# EAGLE board teros_a3977 (EAGLE 4.13)
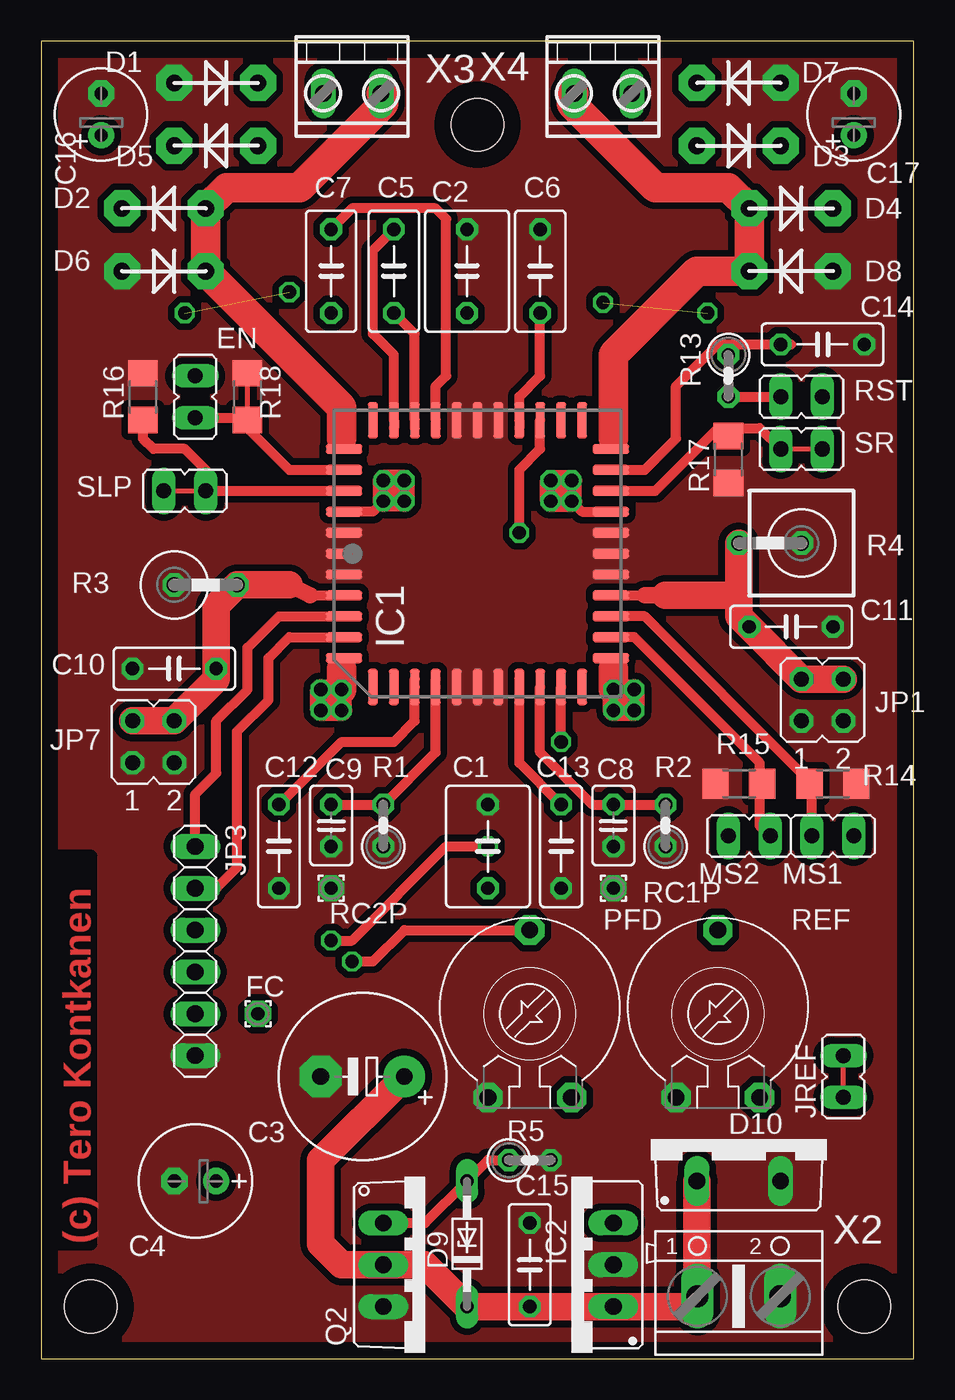
[diagram p0: board, top side]
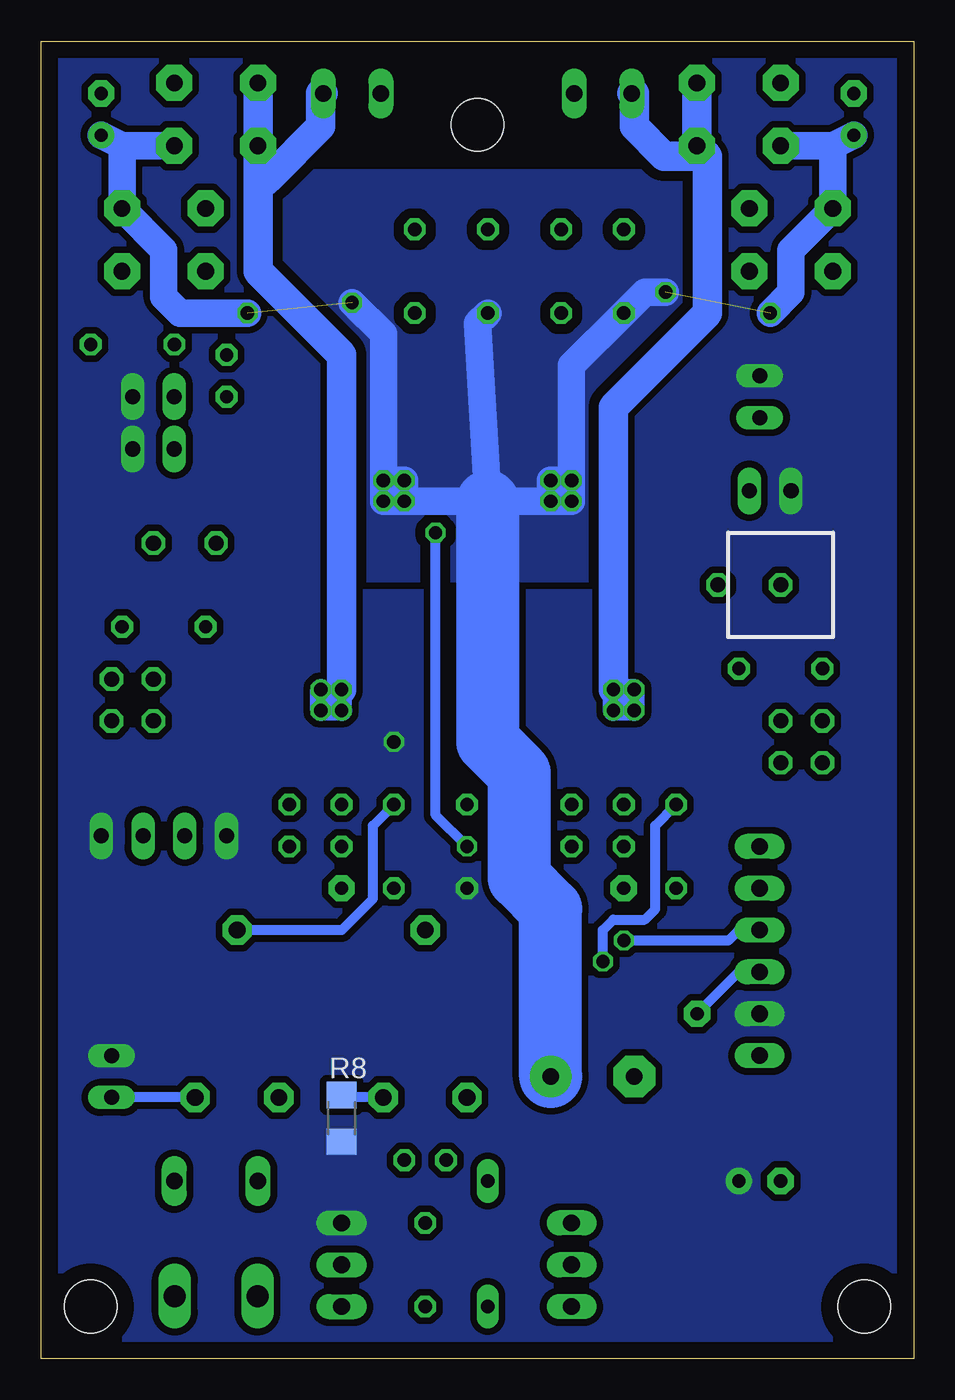
[diagram p1: board, bottom side, seen from below]

Size 53.01 x 80 mm. Coordinates in mm from the lower left corner, seen from the top.
Outline: 0,0 53.01,0 53.01,80 0,80 0,0
Copper layers (1*16): Top 0.035mm / dielectric 1.5mm / Bottom 0.035mm
Design rules "olimex10mils": minimum track width 10mil, minimum drill 24mil, track to track 10mil, track to pad 10mil, pad to pad 10mil, via to via 10mil, smd to smd 10mil, copper to edge 40mil, drill to drill 10mil, minimum pad ring 10mil, minimum via ring 8mil, stop-mask expansion 0mil, vias tented up to drill 0mil, thermal gap 10mil
Holes 3.2 mm at 26.5,74.92 3.01,3.17 50,3.17

## Footprints (pad centres in the part's own frame; a part is rotated, then mirrored left to right if it is on the bottom)
C050-050X075 = drill 0.813 octagon: 1 -2.54,0; 2 2.54,0
E5-10,5 = drill 1.016 pad 2.54 round: + -2.54,0 | drill 1.016 pad 2.54 octagon: - 2.54,0
E2,5-7 = drill 0.813 pad 1.6 round: + -1.27,0 | drill 0.813 pad 1.6 octagon: - 1.27,0
C050-030X075 = drill 0.813 octagon: 1 -2.54,0; 2 2.54,0
C025-025X050 = drill 0.813 octagon: 1 -1.27,0; 2 1.27,0
C050-025X075 = drill 0.813 octagon: 1 -2.54,0; 2 2.54,0
E2,5-6 = drill 0.813 pad 1.6 round: + -1.27,0 | drill 0.813 pad 1.6 octagon: - 1.27,0
DIODE = drill 1.016 pad 2.184 octagon: A 2.54,0; K -2.54,0
DO34Z7 = drill 0.813 long: A 3.81,0; C -3.81,0
TO220ACS = drill 1.016 long: A 2.54,-2.54; C -2.54,-2.54
JP1 = drill 0.914 long: 1 0,-1.27; 2 0,1.27
1,6/0,8 = drill 0.813 pad 1.6 octagon: 1 0,0
PLCC44 = smd 0.6 x 2.2: 1 0,8.1; 2 -1.27,8.1; 3 -2.54,8.1; 4 -3.81,8.1; 5 -5.08,8.1; 6 -6.35,8.1; 18 -6.35,-8.1; 19 -5.08,-8.1; 20 -3.81,-8.1; 21 -2.54,-8.1; 22 -1.27,-8.1; 23 0,-8.1; 24 1.27,-8.1; 25 2.54,-8.1; 26 3.81,-8.1; 27 5.08,-8.1; 28 6.35,-8.1; 40 6.35,8.1; 41 5.08,8.1; 42 3.81,8.1; 43 2.54,8.1; 44 1.27,8.1 | smd 2.2 x 0.6: 7 -8.1,6.35; 8 -8.1,5.08; 9 -8.1,3.81; 10 -8.1,2.54; 11 -8.1,1.27; 12 -8.1,0; 13 -8.1,-1.27; 14 -8.1,-2.54; 15 -8.1,-3.81; 16 -8.1,-5.08; 17 -8.1,-6.35; 29 8.1,-6.35; 30 8.1,-5.08; 31 8.1,-3.81; 32 8.1,-2.54; 33 8.1,-1.27; 34 8.1,0; 35 8.1,1.27; 36 8.1,2.54; 37 8.1,3.81; 38 8.1,5.08; 39 8.1,6.35
78XXS = drill 1.016 long: GND 0,-2.54; IN -2.54,-2.54; OUT 2.54,-2.54
JP2Q = drill 0.914 octagon: 1 -1.27,-1.27; 2 -1.27,1.27; 3 1.27,-1.27; 4 1.27,1.27
1X06 = drill 1.016 long: 1 -6.35,0; 2 -3.81,0; 3 -1.27,0; 4 1.27,0; 5 3.81,0; 6 6.35,0
PT-10 = drill 1.016 pad 1.778 octagon: 1 -2.54,-5.08; 2 2.54,-5.08; 3 0,5.08
TO220AV = drill 1.016 long: B -2.54,-2.54; C 0,-2.54; E 2.54,-2.54
0207/2V = drill 0.813 octagon: 1 -1.27,0; 2 1.27,0
0411V = drill 0.914 octagon: 1 -2.54,0; 2 1.27,0
R1206 = smd 1.6 x 1.803: 1 -1.422,0; 2 1.422,0
AK500/2 = drill 1.321 long: 1 -2.515,0; 2 2.515,0
AK550/2 = drill 1 pad 1.5 long: 1 -1.75,0; 2 1.75,0

## Placement (x,y rotation side)
C1  220n  [C050-050X075]  27.14,31.11 90 top
C2  220n  [C050-050X075]  25.87,66.03 90 top
C3  470u/35V  [E5-10,5]  19.52,17.14 180 top
C4  330u/5V  [E2,5-7]  9.36,10.79 180 top
C5  0.22u  [C050-030X075]  21.42,66.03 90 top
C6  0.22u  [C050-030X075]  30.31,66.03 270 top
C7  0.22u  [C050-030X075]  17.61,66.03 90 top
C8  0.001u  [C025-025X050]  34.76,32.38 90 top
C9  0.001u  [C025-025X050]  17.61,32.38 90 top
C10  0.1u  [C050-025X075]  8.09,41.91 180 top
C11  0.1u  [C050-025X075]  45.55,44.45 0 top
C12  0.1u  [C050-025X075]  14.44,31.11 90 top
C13  0.1u  [C050-025X075]  31.58,31.11 90 top
C14  0.1u  [C050-025X075]  47.46,61.59 0 top
C15  0.1u  [C050-025X075]  29.68,5.71 270 top
C16  100u/35V  [E2,5-6]  3.64,75.56 90 top
C17  100u/35V  [E2,5-6]  49.37,75.56 90 top
D1  BYV27  [DIODE]  10.63,73.66 0 top
D2  BYV27  [DIODE]  7.46,69.84 0 top
D3  BYV27  [DIODE]  42.38,73.66 180 top
D4  BYV27  [DIODE]  45.55,69.84 180 top
D5  BYV27  [DIODE]  10.63,77.46 180 top
D6  BYV27  [DIODE]  7.46,66.03 180 top
D7  BYV27  [DIODE]  42.38,77.46 0 top
D8  BYV27  [DIODE]  45.55,66.03 0 top
D9  34V  [DO34Z7]  25.87,6.98 90 top
D10  PBYR1645  [TO220ACS]  42.38,13.33 0 top
EN  [JP1]  9.36,58.41 0 top
FC  [1,6/0,8]  13.17,20.95 0 top
IC1  A3977SED  [PLCC44]  26.5,48.89 90 top
IC2  7805  [78XXS]  32.22,5.71 90 top
JP1  [JP2Q]  47.46,40 0 top
JP3  [1X06]  9.36,24.76 270 top
JP7  [JP2Q]  6.82,37.46 0 top
JREF  [JP1]  48.73,17.14 0 top
MS1  [JP1]  48.09,31.74 270 top
MS2  [JP1]  43.02,31.74 90 top
PFD  1k  [PT-10]  29.68,20.95 0 top
Q2  TIP121  [TO220AV]  23.33,5.71 270 top
R1  30k  [0207/2V]  20.79,32.38 90 top
R2  30k  [0207/2V]  37.94,32.38 90 top
R3  0.20  [0411V]  10.63,46.98 0 top
R4  0.20  [0411V]  43.65,49.53 180 top
R5  10k  [0207/2V]  29.68,12.06 0 top
R8  820  [R1206]  34.76,14.6 270 bottom
R13  10k  [0207/2V]  41.74,59.69 270 top
R14  10k  [R1206]  48.09,34.92 0 top
R15  10k  [R1206]  42.38,34.92 180 top
R16  10k  [R1206]  6.18,58.41 90 top
R17  10k  [R1206]  41.74,54.61 270 top
R18  10k  [R1206]  12.54,58.41 90 top
RC1P  [1,6/0,8]  34.76,28.57 0 top
RC2P  [1,6/0,8]  17.61,28.57 0 top
REF  1k  [PT-10]  41.11,20.95 0 top
RST  [JP1]  46.19,58.41 270 top
SLP  [JP1]  8.73,52.7 90 top
SR  [JP1]  46.19,55.24 270 top
X2  [AK500/2]  42.38,3.8 0 top
X3  AK550/2  [AK550/2]  18.88,76.83 180 top
X4  AK550/2  [AK550/2]  34.12,76.83 180 top

## Library data of the parts
C1-C17 R1-R5 R8 R13-R18 = rcl
D1-D8 IC1 = stepper
D9 D10 = diode
EN JP1 JP7 JREF MS1 MS2 RST SLP SR = jumper
FC RC1P RC2P = wirepad
IC2 = v-reg
JP3 = pinhead
PFD REF = discrete
Q2 = transistor-power
X2-X4 = con-ptr500

## Nets
ENABLE: EN.1 IC1.41 R18.1
GND: C1.2 C2.2 C3.- C4.- C6.1 C8.1 C9.1 C10.2 C11.2 C12.1 C13.1 C14.2 C15.1 C16.- C17.- D5.A D6.A D7.A D8.A D10.A IC1.1 IC1.2 IC1.11 IC1.12 IC1.13 IC1.22 IC1.23 IC1.24 IC1.33 IC1.34 IC1.35 IC1.44 IC2.GND JP1.1 JP1.3 JP3.6 JP7.1 JP7.3 PFD.1 Q2.E R1.1 R2.1 R3.1 R4.1 R5.2 R14.2 R15.2 R16.2 R17.2 R18.2 RC1P.1 RC2P.1 REF.1 X2.2
MS1: IC1.20 MS1.1 R14.1
MS2: IC1.19 MS2.1 R15.1
N$1: IC1.31 JP3.3
N$2: IC1.5 JP3.2
N$3: R13.2 RST.1
N$4: D2.A D6.K IC1.40 X3.1
N$5: IC1.4 JP3.1
N$6: D4.A D8.K IC1.28 X4.2
N$7: C5.2 IC1.38
N$8: C5.1 IC1.37
N$9: C6.2 IC1.32
N$10: C7.2 IC1.36
N$11: C12.2 IC1.9 PFD.3
N$12: C9.2 IC1.10 R1.2
N$13: PFD.2 R8.1
N$14: JREF.1 REF.2
N$15: C8.2 IC1.15 R2.2
N$16: C10.1 IC1.3 JP7.2 JP7.4 R3.2
N$17: C11.1 IC1.21 JP1.2 JP1.4 R4.2
N$18: C13.2 IC1.14 REF.3
N$19: FC.1 JP3.4
N$20: D9.A Q2.B R5.1
N$22: D3.A D7.K IC1.18 X4.1
N$23: D1.A D5.K IC1.6 X3.2
RESET: C14.1 IC1.27 R13.1
SLEEP: IC1.42 R16.1 SLP.1
SR: IC1.26 R17.1 SR.1
V+: C2.1 C3.+ C7.1 C15.2 C16.+ C17.+ D1.K D2.K D3.K D4.K D9.C D10.C IC1.25 IC1.43 IC2.IN Q2.C X2.1
VCC: C1.1 C4.+ EN.2 IC1.16 IC2.OUT JP3.5 JREF.2 MS1.2 MS2.2 R8.2 RST.2 SLP.2 SR.2

## Tracks (layer width: path | path; a pad name or v marks a point on that pad's centre or on a via)
ENABLE
  Top 0.305: 12.54,57.15 12.54,59.05
  Top 0.61: IC1.41 15.08,53.97 12.54,56.51 R18.1 | R18.1 12.54,57.15 | R18.1 12.38,57.15 EN.1
GND
  pour Top (isolate 0.406, no thermals): -3.34,89.53 61.43,89.53 61.43,-5.72 -3.34,-5.72
MS1
  Top 0.61: 34.12,45.08 IC1.20 36.66,45.08 46.19,35.55 46.19,34.92 R14.1 46.82,34.92 MS1.1
MS2
  Top 0.61: 34.12,43.81 IC1.19 36.03,43.81 43.65,36.19 43.65,34.92 | 43.65,34.92 R15.1 | MS2.1 43.65,32.38 43.65,34.92
N$1  (via drill 0.8)
  Top 0.61: IC1.31 30.31,55.24 29.04,53.97 v29.04,50.16 | v27.14,31.11 24.6,31.11 18.88,25.39 v17.61,25.39
  Bottom 0.61: v27.14,31.11 29.04,33.02 v29.04,50.16 | v17.61,25.39 11.27,25.39 10.63,26.03 JP3.3
N$2
  Top 0.61: IC1.5 15.08,43.81 13.81,42.54 13.81,40 11.9,38.1 11.9,29.84 10.63,28.57 JP3.2
N$3
  Top 0.61: R13.2 RST.1
N$4
  Top 0.61: IC1.40 18.4,55.72 18.25,55.88
  Top 1.778: 18.25,55.88 18.25,57.78 D6.K D2.A 11.27,71.11 15.71,71.11 20.79,76.19 20.79,76.83 X3.1
N$5
  Top 0.61: IC1.4 14.44,45.08 12.54,43.18 12.54,40.64 10.63,38.73 10.63,35.55 9.36,34.29 JP3.1
N$6
  Top 0.61: IC1.28 34.6,55.72 34.76,55.88
  Top 1.778: 34.76,55.88 34.76,60.96 39.84,66.03 D8.K D4.A 41.74,71.11 37.3,71.11 32.22,76.19 32.22,76.83 X4.2
N$7
  Top 0.61: 21.42,56.51 IC1.38 21.42,60.96 20.15,62.23 20.15,67.3 C5.2
N$8
  Top 0.61: 22.7,56.51 IC1.37 22.7,62.23 C5.1
N$9
  Top 0.61: 29.04,56.51 IC1.32 29.04,58.41 30.31,59.69 C6.2
N$10
  Top 0.61: C7.2 18.88,69.84 23.96,69.84 24.6,69.21 24.6,59.69 23.96,59.05 IC1.36 23.96,56.51
N$11  (via drill 0.8)
  Top 0.61: 22.7,41.27 IC1.9 22.7,38.73 21.42,37.46 18.25,37.46 C12.2 | PFD.3 22.06,26.03 20.15,24.12 v18.88,24.12
  Bottom 0.61: v18.88,24.12 18.88,26.03 18.25,26.66 16.34,26.66 15.71,27.3 15.71,32.38 C12.2
N$12
  Top 0.61: 23.96,41.27 IC1.10 23.96,36.83 R1.2 C9.2
N$13
  Bottom 0.61: R8.1 34.76,15.87 PFD.2
N$14
  Top 0.305: JREF.1 48.73,18.41
  Bottom 0.61: REF.2 JREF.1
N$15
  Top 0.61: IC1.15 30.31,36.83 33.49,33.65 C8.2 R2.2
N$16
  Top 0.61: 16.34,46.35 IC1.3
  Top 1.016: 15.08,46.98 16.34,46.35
  Top 1.676: 15.08,46.98 R3.2 10.63,45.72 C10.1 10.63,41.27 JP7.4 JP7.2
N$17
  Top 0.61: IC1.21 36.66,46.35
  Top 1.016: 36.66,46.35 37.94,46.35
  Top 1.676: 37.94,46.35 42.38,46.35 | 42.38,46.35 R4.2 | 42.38,46.35 42.38,45.08 C11.1 JP1.2 JP1.4
N$18
  Top 0.61: 29.04,41.27 IC1.14 29.04,36.19 C13.2
  Bottom 0.61: REF.3 34.76,26.03 32.85,27.93 32.85,32.38 C13.2
N$19
  Bottom 0.61: JP3.4 10.63,23.49 FC.1
N$20
  Top 0.61: R5.1 27.14,12.06 D9.A 23.33,8.25 Q2.B
N$22  (via drill 0.81)
  Top 0.61: IC1.18 34.76,42.54 34.76,41.91
  Top 1.27: v34.76,39.37 v36.03,39.37 v36.03,40.64 v34.76,40.64 v34.76,39.37
  Top 1.778: v34.76,40.64 34.76,41.91
  Bottom 1.27: v36.03,40.64 v36.03,39.37 v34.76,39.37 v34.76,40.64
  Bottom 1.778: D7.K D3.A 39.84,71.11 | 39.84,71.11 39.1,71.75 36.03,74.82 36.03,76.83 X4.1 | v34.76,40.64 34.76,60.96 39.84,66.03 39.84,71.11
N$23  (via drill 0.81)
  Top 0.61: IC1.6 18.25,42.54 18.25,41.91
  Top 1.27: v16.98,39.37 v16.98,40.64 v18.25,40.64 v18.25,39.37 v16.98,39.37
  Top 1.778: v18.25,40.64 18.25,41.91
  Bottom 1.27: v16.98,39.37 v18.25,39.37 v18.25,40.64 v16.98,40.64 v16.98,39.37
  Bottom 1.778: D5.K D1.A 12.54,73.02 | 12.54,73.02 12.54,63.5 18.25,57.78 v18.25,40.64 | 12.54,73.02 15.18,73.02 16.98,74.82 16.98,76.83 X3.2
RESET
  Top 0.305: R13.1 41.74,58.41
  Top 0.61: 34.12,53.97 IC1.27 36.66,53.97 38.57,55.88 38.57,59.05 41.11,61.59 41.74,61.59 | 41.74,61.59 C14.1 45.55,61.59 | 41.74,61.59 R13.1
SLEEP
  Top 0.61: IC1.42 SLP.1 10,53.97 8.73,55.24 6.82,55.24 6.18,55.88 R16.1
SR
  Top 0.61: 34.12,52.7 IC1.26 37.3,52.7 41.11,56.51 41.74,56.51 | 41.74,56.51 43.65,56.51 SR.1 | 41.74,56.51 R17.1
V+  (via drill 0.81)  (2 unrouted)
  Top 0.61: IC1.43 20.15,51.43 v20.79,52.07 | IC1.25 32.85,51.43 v32.22,52.07
  Top 1.27: v32.22,52.07 v32.22,53.34 v30.95,53.34 v30.95,52.07 v32.22,52.07 | v20.79,52.07 v20.79,53.34 v22.06,53.34 v22.06,52.07 v20.79,52.07
  Top 1.676: 39.84,3.8 X2.1 | 39.84,3.8 D10.C | 39.84,3.8 39.2,3.17 IC2.IN C15.2 D9.C 23.33,5.71 Q2.C 18.25,5.71 16.98,6.98 16.98,12.06 C3.+
  Bottom 1.676: 4.92,73.66 D2.K 7.46,67.3 7.46,64.77 v8.73,63.5 | 4.92,73.66 D1.K | 48.09,73.66 D4.K 45.55,67.3 45.55,64.5 44.55,63.5 v40.48,63.5 | 48.09,73.66 D3.K | v22.06,52.07 v20.79,52.07 v20.79,53.34 | v30.95,52.07 v32.22,52.07 v32.22,53.34 | v22.06,52.07 v22.06,53.34 v20.79,53.34 | v30.95,52.07 v30.95,53.34 v32.22,53.34 | 25.87,52.07 v30.95,52.07 | 25.87,52.07 v22.06,52.07 | v32.22,53.34 32.22,62.23 v34.12,64.13 | v20.79,53.34 20.79,60.32 C7.1 16.34,64.77 v15.08,64.77 | C2.1 26.5,62.86 25.87,52.07 | 48.09,73.66 C17.+ | 4.92,73.66 C16.+ | X2.1 39.84,3.8
  Bottom 3.81: 25.87,52.07 25.87,37.46 23.96,35.55 23.96,29.2 22.06,27.3 C3.+
  pour Bottom (isolate 0.61, no thermals): 24.6,47.62 18.25,47.62 18.25,57.78 13.17,62.86 13.17,71.75 39.84,71.75 39.84,66.67 34.76,61.59 34.76,47.62 20.79,47.62
VCC  (via drill 0.81)
  Top 0.305: 44.92,55.24 SR.2 | SLP.2 10,52.7
  Top 0.61: v31.58,37.46 IC1.16
  pour Bottom (isolate 0.406, rank 3, no thermals): -2.07,81.91 60.16,81.91 60.16,-3.18 -2.07,-3.18

## Text on the board
Top: (c) Tero Kontkanen